# Altium PCB DA2_VERR2_PCB.PcbDoc (part 2 of 2)
Units mm, origin at the board's own origin, x right, y up, seen from the top; angles counter-clockwise.
Board outline 82.3 x 48.77 mm, 2 copper layers (Top Layer, Bottom Layer), stack 1.58 mm thick; 68 components, 71 nets, 299 pads, 149 vias.
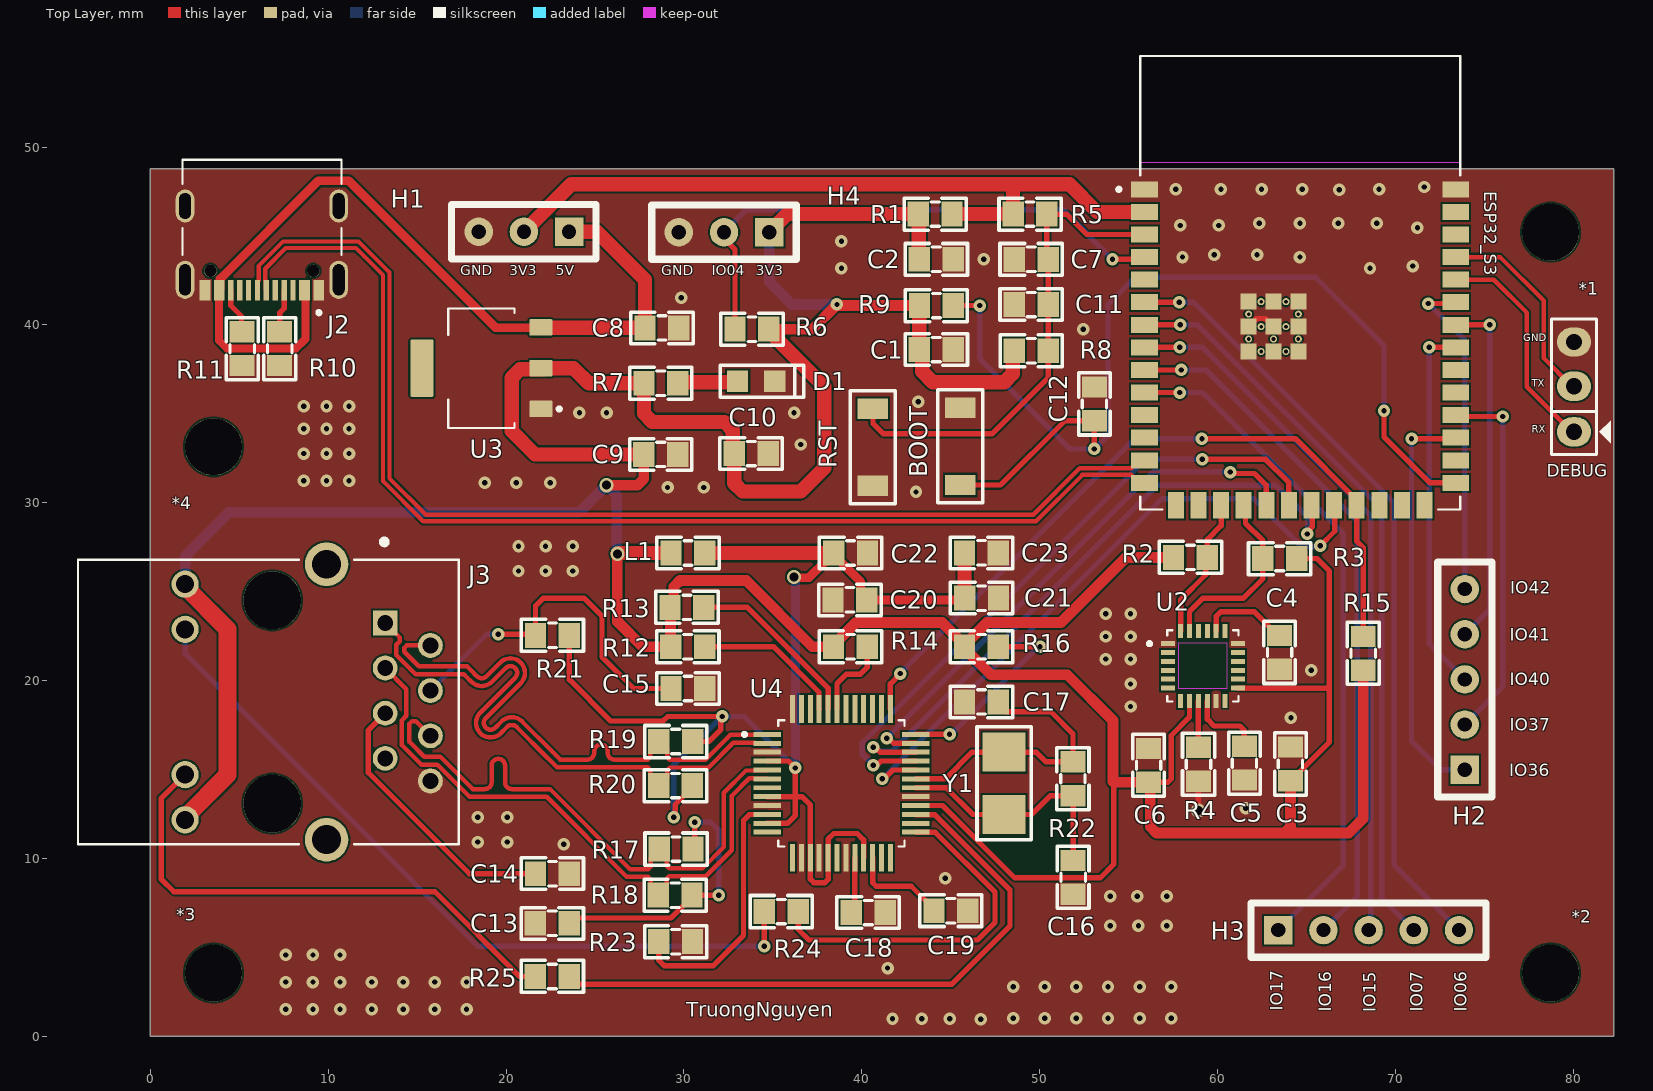
[diagram p0: Top Layer view]

## Via types
v1: diameter 0.7, hole 0.3, Top Layer to Bottom Layer, tented both sides, 145 vias
v2: diameter 0.8, hole 0.5, Top Layer to Bottom Layer, tented both sides, 4 vias

## Nets (pads, with @x,y where several pads share a name; then routed paths per layer and width w, separated by ;. In a path a pad name is that pad's centre, name@x,y a point inside that pad or via, vN(x,y) a via of type N, cw(c..) or ccw(c..) an arc to the next point about the centre after c; other vN are vias at no path point) (continued)
ETH_TX_N: J3.2 R19.1 U4.1 | length 34
  Top Layer w0.249: J3.2 14.417,21.976 14.271,21.83 14.271,21.624 15.096,20.799 17.809,20.799 18.123,20.485 18.302,20.306 18.366,20.242 ccw(c18.634,20.509) 18.901,20.242 19.672,21.012 ; 19.672,21.013 cw(c20.251,20.434) 20.829,21.013 cw(c20.251,20.434) 20.829,19.856 18.862,17.889 ccw(c19.129,17.621) 18.861,17.353 ccw(c19.129,17.621) 19.396,17.353 19.747,17.704 cw(c20.326,17.126) 20.831,17.768 20.84,17.768 20.903,17.705 ; 20.904,17.704 22.601,16.007 22.78,15.828 23.049,15.559 23.52,15.559 24.58,15.559 ccw(c24.58,15.938) 24.958,15.938 24.958,16.022 cw(c25.337,16.022) 25.715,16.022 25.715,15.938 ccw(c26.094,15.938) 26.094,15.559 26.975,15.559 27.973,15.559 28.119,15.705 28.119,16.101 R19.1 29.056,16.115 29.056,15.699 29.201,15.553 31.211,15.553 32.602,16.944 33.981,16.944 33.995,16.958 34.666,16.958 U4.1
ETH_TX_P: J3.1 R20.1 U4.2 | length 34
  Top Layer w0.249: J3.1 14.034,22.42 14.034,22.214 13.832,22.012 13.832,21.442 14.914,20.359 17.627,20.359 17.812,20.174 17.991,19.995 18.055,19.931 ccw(c18.634,20.509) 19.212,19.931 19.984,20.703 cw(c20.251,20.434) 20.518,20.702 cw(c20.251,20.434) 20.518,20.167 18.55,18.199 ccw(c19.129,17.621) 18.55,17.042 ccw(c19.129,17.621) 19.707,17.042 20.058,17.393 cw(c20.326,17.126) 20.594,17.393 22.29,15.696 22.469,15.517 22.867,15.12 27.973,15.12 28.119,14.974 28.119,14.558 R20.1 29.056,14.573 29.056,14.968 29.201,15.114 31.393,15.114 32.784,16.504 33.981,16.504 33.995,16.49 34.666,16.49 U4.2
GND: BOOT.2 C1.1 C2.1 C3.1 C4.2 C5.1 C6.1 C7.1 C8.1 C9.1 C10.2 C11.1 C12.1 C13.2 C14.2 C15.2 C16.2 C17.2 C18.2 C19.2 C20.2 C21.2 C22.2 C23.1 D1.1 DEBUG.3 ESP32_S3.1 ESP32_S3.40 ESP32_S3.41_1 ESP32_S3.41_2 ESP32_S3.41_3 ESP32_S3.41_4 ESP32_S3.41_5 ESP32_S3.41_6 ESP32_S3.41_7 ESP32_S3.41_8 ESP32_S3.41_9 H1.3 H4.3 J2.A1_B12 J2.A12_B1 J2.SH1 J2.SH2 J2.SH3 J2.SH4 J3.8 R4.1 R10.1 R11.1 R23.1 RST.2 U2.1 U2.11 U2.18 U3.1 U4.3 U4.9 U4.14 U4.16 U4.19 U4.29 U4.48 | length 3.4
  Top Layer w0.3: v2(58.928,12.7) 58.928,14.335 R4.1 ; ESP32_S3.41_2 62.206,40.355 62.706,40.355 ESP32_S3.41_1
  other v1: 46.685,0.965 41.732,0.991 43.383,0.991 44.958,0.991 48.514,1.016 50.292,1.016 52.07,1.016 53.848,1.016 55.626,1.016 57.404,1.016 7.62,1.524 9.144,1.524 10.668,1.524 12.446,1.524 14.224,1.524 16.002,1.524 17.78,1.524 48.514,2.794 50.292,2.794 52.07,2.794 53.848,2.794 55.626,2.794 57.404,2.794 7.62,3.048 9.144,3.048 10.668,3.048 12.446,3.048 14.224,3.048 16.002,3.048 17.78,3.048 41.453,3.835 7.62,4.572 9.144,4.572 10.668,4.572 53.975,6.223 55.562,6.221 57.15,6.223 53.975,7.874 55.499,7.874 57.15,7.874 44.704,8.89 23.241,10.795 18.415,10.922 20.066,10.922 18.415,12.319 20.066,12.319 61.595,12.827 64.135,17.907 55.118,18.542 55.118,19.812 65.278,20.574 53.721,21.209 55.118,21.209 53.721,22.479 55.118,22.479 53.721,23.749 55.118,23.749 20.701,26.162 22.225,26.162 23.749,26.162 20.701,27.559 22.225,27.559 23.749,27.559 43.053,30.607 29.083,30.861 31.115,30.861 18.796,31.115 20.574,31.115 22.479,31.115 8.636,31.242 9.906,31.242 11.176,31.242 8.636,32.766 9.906,32.766 11.176,32.766 36.576,33.274 8.636,34.163 9.906,34.163 11.176,34.163 24.13,35.052 25.654,35.052 36.195,35.052 8.636,35.433 9.906,35.433 11.176,35.433 43.18,35.687 52.451,39.751 29.845,41.529 38.862,43.18 68.58,43.18 70.993,43.307 46.863,43.688 58.039,43.815 64.643,43.815 59.817,43.942 62.23,43.942 38.862,44.704 71.247,45.466 57.912,45.593 60.071,45.593 62.357,45.72 64.643,45.72 66.802,45.72 68.961,45.72 66.847,47.591 57.658,47.625 60.198,47.625 62.484,47.625 64.77,47.625 69.088,47.625 71.628,47.752
GPIO0: BOOT.1 C12.2 ESP32_S3.27 R9.2 | length 60.1
  Top Layer w0.3: R9.2 v1(46.644,41.087) ; BOOT.1 47.808,30.997 51.417,34.606 C12.2 v1(53.083,33.023) ; v1(69.367,35.179) 69.367,33.706 71.958,31.115 ESP32_S3.27
  Bottom Layer w0.3: v1(46.644,41.087) 46.644,38.09 51.711,33.023 v1(53.083,33.023) 53.848,33.789 53.848,41.148 55.372,42.672 65.532,42.672 69.367,38.837 v1(69.367,35.179)
GPIO1: ESP32_S3.39
GPIO2: ESP32_S3.38
GPIO3: ESP32_S3.15
GPIO4: ESP32_S3.4 H4.2 R6.2 | length 31.1
  Top Layer w0.3: H4.2 32.258,44.86 32.878,44.24 R6.2 ; v1(54.102,43.688) 55.779,43.688 ESP32_S3.4
  Bottom Layer w0.3: H4.2 33.528,46.482 51.308,46.482 v1(54.102,43.688)
GPIO5: ESP32_S3.5
GPIO6: ESP32_S3.6 H3.5 | length 44.2
  Top Layer w0.3: ESP32_S3.6 v1(57.861,41.275)
  Bottom Layer w0.3: v1(57.861,41.275) 58.649,41.275 69.926,29.997 69.926,9.627 H3.5
GPIO7: ESP32_S3.7 H3.4 | length 42
  Top Layer w0.3: ESP32_S3.7 v1(57.912,40.005)
  Bottom Layer w0.3: v1(57.912,40.005) 58.877,40.005 69.24,29.642 69.24,7.772 H3.4
GPIO8: ESP32_S3.12
GPIO9: ESP32_S3.17 R2.1 U2.24 | length 8
  Top Layer w0.3: U2.24 57.932,24.538 59.344,25.95 59.344,26.832 R2.1 59.436,27.94 60.211,28.715 ESP32_S3.17
GPIO10: ESP32_S3.18 R3.1 U2.23 | length 10.7
  Top Layer w0.3: U2.23 58.432,23.888 59.182,24.638 61.468,24.638 62.554,25.724 R3.1 62.554,27.87 61.583,28.841 61.583,29.459 61.329,29.713 ESP32_S3.18
GPIO11: ESP32_S3.19 U4.35 | length 30.7
  Top Layer w0.3: v1(41.402,16.764) 41.51,16.764 41.8,16.474 U4.35 ; v1(60.731,31.725) 60.808,31.648 62.078,31.648 62.751,30.975 ESP32_S3.19
  Bottom Layer w0.3: v1(41.402,16.764) 56.375,31.737 60.719,31.737 v1(60.731,31.725)
GPIO12: ESP32_S3.20 U4.33 | length 36.4
  Top Layer w0.3: v1(40.64,15.24) 40.717,15.317 40.925,15.317 41.082,15.474 U4.33 ; v1(59.157,32.436) 62.713,32.436 64.021,31.127 ESP32_S3.20
  Bottom Layer w0.3: v1(40.64,15.24) 40.04,15.84 40.04,16.505 55.971,32.436 v1(59.157,32.436)
GPIO13: ESP32_S3.21 U4.34 | length 36.7
  Top Layer w0.3: v1(40.64,16.256) 40.748,16.256 41.03,15.974 U4.34 ; v1(65.049,28.245) 65.049,28.353 65.329,28.632 65.329,29.827 ESP32_S3.21
  Bottom Layer w0.3: v1(40.64,16.256) 40.748,16.256 40.987,16.017 41.671,16.017 56.642,30.988 63.271,30.988 65.065,29.195 65.065,28.26 v1(65.049,28.245)
GPIO14: ESP32_S3.22 U4.32 | length 37.1
  Top Layer w0.3: v1(41.148,14.478) 41.256,14.478 41.752,14.974 U4.32 ; v1(65.786,27.584) 66.599,28.397 66.599,29.827 ESP32_S3.22
  Bottom Layer w0.3: v1(41.148,14.478) 56.896,30.226 62.037,30.226 64.755,27.508 65.709,27.508 v1(65.786,27.584)
GPIO15: ESP32_S3.8 H3.3 | length 40
  Top Layer w0.3: ESP32_S3.8 v1(57.887,38.735)
  Bottom Layer w0.3: v1(57.887,38.735) 59.157,38.735 68.631,29.261 68.631,6.096 H3.3
GPIO16: ESP32_S3.9 H3.2 | length 39.3
  Top Layer w0.3: ESP32_S3.9 v1(57.963,37.465)
  Bottom Layer w0.3: v1(57.963,37.465) 59.36,37.465 67.869,28.956 67.869,7.874 H3.2
GPIO17: ESP32_S3.10 H3.1 | length 38.3
  Top Layer w0.3: ESP32_S3.10 v1(57.887,36.195)
  Bottom Layer w0.3: v1(57.887,36.195) 59.157,36.195 67.081,28.27 67.081,9.627 H3.1
GPIO18: ESP32_S3.11
GPIO21: ESP32_S3.23 R15.1 U4.37 | length 42.6
  Top Layer w0.3: U4.37 41.612,19.817 42.164,20.369 v1(42.164,20.396) ; v1(59.131,33.604) 64.392,33.604 67.831,30.165 ESP32_S3.23 67.831,27.851 68.199,27.483 R15.1
  Bottom Layer w0.3: v1(42.164,20.396) 55.372,33.604 v1(59.131,33.604)
GPIO35: ESP32_S3.28
GPIO36: ESP32_S3.29 H2.1 | length 23.2
  Top Layer w0.3: v1(70.917,33.604) 73.355,33.604 ESP32_S3.29
  Bottom Layer w0.3: v1(70.917,33.604) 70.917,16.612 72.542,14.986 H2.1
GPIO37: ESP32_S3.30 H2.2 | length 20.9
  Top Layer w0.3: ESP32_S3.30 73.482,34.849 v1(76.048,34.849)
  Bottom Layer w0.3: H2.2 76.048,19.66 v1(76.048,34.849)
GPIO38: ESP32_S3.31
GPIO39: ESP32_S3.32
GPIO40: ESP32_S3.33 H2.3 | length 21
  Top Layer w0.3: v1(71.907,38.735) ESP32_S3.33
  Bottom Layer w0.3: v1(71.907,38.735) 71.907,22.073 H2.3
GPIO41: ESP32_S3.34 H2.4 | length 19.9
  Top Layer w0.3: ESP32_S3.34 v1(75.311,40.005)
  Bottom Layer w0.3: H2.4 75.311,24.003 v1(75.311,40.005)
GPIO42: ESP32_S3.35 H2.5 | length 18.5
  Top Layer w0.3: v1(71.857,41.199) 73.33,41.199 ESP32_S3.35
  Bottom Layer w0.3: v1(71.857,41.199) 73.914,39.141 H2.5
GPIO45: ESP32_S3.26
GPIO46: ESP32_S3.16
GPIO47: ESP32_S3.24
GPIO48: ESP32_S3.25
INT: U2.12
INTN: R16.1 U4.36 | length 11.4
  Top Layer w0.3: U4.36 v1(44.939,16.974) ; R16.1 v1(50.028,21.905)
  Bottom Layer w0.3: v1(44.939,16.974) 45.018,16.974 49.949,21.905 v1(50.028,21.905)
LINKLED: R24.1 U4.25 | length 20.3
  Top Layer w0.3: R24.1 36.424,6.02 37.033,5.41 46.507,5.41 47.498,6.401 47.498,8.103 44.127,11.474 U4.25
NetC4_1: C4.1 U2.20 | length 5
  Top Layer w0.3: U2.20 59.932,23.61 60.198,23.876 62.056,23.876 63.397,22.536 C4.1
NetC5_2: C5.2 U2.10 | length 4.3
  Top Layer w0.3: U2.10 59.432,17.83 59.815,17.447 61.267,17.447 61.519,17.196 C5.2
NetC13_1: C13.1 R17.1 R18.1 | length 15.9
  Top Layer w0.3: C13.1 23.853,6.655 29.28,6.655 30.46,7.835 R18.1 v1(31.969,7.935) ; R17.1 30.607,10.621 v1(30.607,12.04)
  Bottom Layer w0.3: v1(30.607,12.04) 31.496,12.04 31.969,11.567 v1(31.969,7.935)
NetC14_1: C14.1 J3.5 | length 15.5
  Top Layer w0.3: J3.5 12.259,17.217 12.259,14.817 17.936,9.141 C14.1
NetC15_1: C15.1 J3.4 R21.1 | length 20.2
  Top Layer w0.3: v1(19.558,22.606) 21.6,22.606 R21.1 21.66,24.2 22.098,24.638 24.384,24.638 25.4,23.622 25.4,21.336 27.181,19.555 C15.1
  Bottom Layer w0.3: J3.4 18.918,22.606 v1(19.558,22.606)
NetC16_1: C16.1 R22.1 U4.30 Y1.1 | length 13.5
  Top Layer w0.3: U4.30 44.751,13.974 46.251,12.474 49.558,12.474 50.616,13.532 R22.1 51.889,13.52 C16.1
NetC17_1: C17.1 R22.2 U4.31 Y1.2 | length 16.3
  Top Layer w0.3: U4.31 44.7,14.474 46.2,15.974 49.812,15.974 50.354,15.432 R22.2@51.777,15.432 ; C17.1@47.752,18.729 C17.1 47.682,18.699 48.132,18.249 50.635,18.249 51.877,17.008 R22.2
NetC18_1: C18.1 U4.20 | length 3.2
  Top Layer w0.3: C18.1 39.612,7.153 U4.20
NetC19_1: C19.1 U4.22 | length 5.6
  Top Layer w0.3: U4.22 40.612,8.639 40.816,8.434 42.787,8.434 44.063,7.158 C19.1
NetD1_2: D1.2 R7.2 | length 3.5
  Top Layer w0.8: R7.2@29.673,36.702 R7.2 29.712,36.774 32.964,36.774 D1.2 ; D1.2@32.86,36.956 D1.2@32.876,36.94
NetJ2_A5: J2.A5 R10.2 | length 2.5
  Top Layer w0.3: R10.2 7.274,40.675 7.524,40.924 J2.A5
NetJ2_B5: J2.B5 R11.2 | length 2.6
  Top Layer w0.3: J2.B5 4.524,41.095 5.131,40.487 5.131,39.648 R11.2
NetJ3_10: J3.10 R24.2 | length 42.7
  Top Layer w0.3: v1(34.524,5.06) R24.2
  Bottom Layer w0.3: J3.10 1.958,21.512 18.41,5.06 v1(34.524,5.06)
NetJ3_11: J3.11 R25.2 | length 29.7
  Top Layer w0.3: J3.11 0.61,13.363 0.61,8.839 1.321,8.128 16.002,8.128 20.767,3.363 R25.2
NetR12_1: R12.1 U4.45 | length 8.4
  Top Layer w0.3: R12.1 35.042,21.905 37.602,19.345 37.602,18.414 U4.45
NetR13_1: R13.1 U4.44 | length 10
  Top Layer w0.3: R13.1 33.569,24.115 38.112,19.571 U4.44
NetR14_1: R14.1 U4.43 | length 4.7
  Top Layer w0.3: U4.43 38.612,19.835 39.137,20.361 39.921,20.361 40.316,20.755 R14.1
NetR23_2: R23.2 U4.10 | length 14.6
  Top Layer w0.3: R23.2 28.586,4.282 28.905,3.962 31.648,3.962 33.35,5.664 33.35,12.141 33.683,12.474 U4.10
U0RXD: DEBUG.1 ESP32_S3.36 | length 12.6
  Top Layer w0.249: ESP32_S3.36 75.54,42.545 77.394,40.691 77.394,36.519 79.927,33.985 DEBUG.1
U0TXD: DEBUG.2 ESP32_S3.37 | length 11.6
  Top Layer w0.249: ESP32_S3.37 75.895,43.815 78.359,41.351 78.359,38.119 79.927,36.551 DEBUG.2
VCC_3V3: C1.2 C2.2 C3.2 C6.2 C9.2 C10.1 H4.1 J3.9 J3.12 L1.1 R1.2 R2.2 R3.2 R6.1 R7.1 R8.1 R9.1 R12.2 R13.2 R14.2 R15.2 R16.2 U2.8 U2.13 U3.2 U4.28 | length 264.6
  Top Layer w0.3: U4.28 44.532,12.974 48.59,8.915 53.416,8.915 54.164,9.663 54.164,14.286 ; C6.2@56.231,14.286 57.212,14.286 57.404,14.478 57.404,16.916 58.432,17.944 U2.8 ; U2.13 66.263,19.578 66.294,19.609 ; C3.2 66.294,16.55 66.294,19.609 ; R3.2 65.593,26.863 66.294,26.162 66.294,19.609
  Top Layer w0.6: v2(25.654,30.988) 27.396,30.988 27.748,31.339 C9.2 ; v2(26.264,27.127) 26.264,23.317 27.676,21.905 R12.2 ; R12.2@29.246,22.03 29.246,24.089 R13.2 29.431,24.325 29.431,25.277 29.783,25.629 33.503,25.629 37.226,21.905 R14.2 38.416,22.005 39.677,23.266 44.52,23.266 R16.2@45.782,22.005 ; R6.1 37.221,39.761 v1(38.608,41.148) 38.635,41.148 38.696,41.087 R9.1 ; C6.2@56.231,14.286 C6.2@56.227,14.286 ; R2.2 54.864,26.924 51.206,23.266 47.043,23.266 R16.2@45.782,22.005 ; C3.2 64.106,11.781 63.755,11.43 ; R15.2 68.199,12.243 67.386,11.43 63.755,11.43 ; R16.2@45.782,22.005 R16.2 45.782,21.805 47.266,20.32 51.562,20.32 54.125,17.757 54.125,14.324 54.164,14.286 C6.2 C6.2@56.227,14.286 ; C6.2@56.227,14.286 56.227,11.781 56.578,11.43 63.755,11.43
  Top Layer w0.8: v2(26.264,27.127) 26.311,27.175 L1.1 ; C9.2 21.637,32.719 20.32,34.036 20.32,37.033 20.789,37.502 22.088,37.502 22.153,37.567 23.8,37.567 24.648,36.718 R7.1 27.756,35.013 28.225,34.544 32.283,34.544 32.752,34.075 32.752,32.847 C10.1 32.836,31.101 33.305,30.632 36.576,30.632 37.897,31.953 37.897,36.543 34.778,39.661 R6.1 ; H4.1 35.814,46.228 R1.2 ; R1.2@43.211,46.159 43.211,43.722 C2.2 ; R9.1@43.242,40.978 C1.2 43.4,38.453 43.4,37.372 43.993,36.779 48.018,36.779 48.487,37.248 48.487,38.45 R8.1
  Top Layer w1: J3.12 1.958,12.314 4.343,14.7 4.343,22.892 1.958,25.278 J3.9
  Bottom Layer w0.6: J3.9 1.958,27.002 4.42,29.464 24.13,29.464 v2(25.654,30.988) ; v2@25.656,30.986 26.225,30.417 26.225,27.165 v2(26.264,27.127) ; H4.1 34.798,42.418 36.068,41.148 v1(38.608,41.148)
VCC_5V: C8.2 H1.1 J2.A4_B9 J2.A9_B4 U3.3 | length 49.3
  Top Layer w0.45: J2.A9_B4 3.874,39.111 4.321,38.663 8.119,38.663 8.181,38.663 8.724,39.206 J2.A4_B9@8.724,41.91
  Top Layer w0.5: J2.A9_B4 3.924,42.01 3.924,42.58 9.451,48.108 11.151,48.108 19.416,39.842 21.978,39.842 U3.3 ; J2.A4_B9 J2.A4_B9@8.724,41.91 ; C8.2@27.803,39.842 C8.2
  Top Layer w0.8: U3.3@21.978,39.842 C8.2@27.803,39.842 ; H1.1 25.121,45.237 27.818,42.54 C8.2
VCC_PHYA(3V3): C20.1 C21.1 C22.1 C23.2 L1.2 R19.2 R20.2 R21.2 U4.4 U4.8 U4.11 U4.15 U4.17 U4.21 | length 81.2
  Top Layer w0.3: R21.2 23.56,20.051 25.883,17.729 28.838,17.729 29.093,17.984 v1(32.156,17.984) 32.079,17.908 32.079,17.246 31.41,16.576 R19.2 ; v1(29.439,12.319) 29.515,12.396 29.515,13.032 30.48,13.997 R20.2 ; U4.11 35.825,11.974 36.271,12.421 36.271,13.474 ; U4.8 36.271,13.474 ; U4.4 35.885,15.474 v1(36.271,15.088) 36.271,13.474 ; U4.21 40.112,11.044 39.751,11.405 38.43,11.405 38.112,11.086 38.112,8.812 37.936,8.636 37.313,8.636 37.112,8.837 37.112,13.002 36.64,13.474 36.271,13.474
  Top Layer w0.5: v2(36.195,25.832) 36.246,25.781 37.031,25.781 37.974,26.725 38.074,26.725 C22.1@38.424,27.075 ; C22.1 C22.1@38.424,27.075 ; C21.1 45.696,24.54 C20.1 39.944,24.886 39.944,25.555 C22.1@38.424,27.075
  Top Layer w0.8: L1.2 C22.1 ; C23.2@45.782,27.081 C23.2 45.786,27.177 45.786,24.639 C21.1
  Bottom Layer w0.3: v1(29.439,12.319) 29.439,15.267 v1(32.156,17.984) 33.375,17.984 v1(36.271,15.088)
  Bottom Layer w0.5: v2(36.195,25.832) 36.195,25.751 36.271,25.674 v1(36.271,15.088)
XCL: U2.7
XDA: U2.6
pads on no net: *1.1 *2.1 *3.1 *4.1 ESP32_S3.41_11 ESP32_S3.41_12 ESP32_S3.41_13 ESP32_S3.41_14 ESP32_S3.41_15 ESP32_S3.41_16 ESP32_S3.41_17 ESP32_S3.41_18 ESP32_S3.41_19 ESP32_S3.41_20 ESP32_S3.41_21 J2. J2.A8 J2.B6 J2.B7 J2.B8 J3. J3.7 J3.15 J3.16 U2.2 U2.3 U2.4 U2.5 U2.14 U2.15 U2.16 U2.17 U2.19 U2.21 U2.22 U3.4 U4.7 U4.12 U4.13 U4.18 U4.23 U4.24 U4.26 U4.38 U4.39 U4.40 U4.41 U4.42 U4.46 U4.47

## Polygon pours and split planes (outlines as drawn)
GND on Top Layer "GND" (solid, remove dead copper, pour order 0): 0,48.768 82.296,48.768 82.296,0 0,0
GND on Bottom Layer "GND" (solid, remove dead copper, pour order 1): 0,48.768 82.296,48.768 82.296,0 0,0

## Silkscreen, mask and mechanical layers (free items; w line width, h text height)
Top Overlay:
  text "GND" at 17.424,42.596 h1
  text "3V3" at 20.193,42.596 h1
  text "5V" at 22.784,42.596 h1
  text "GND" at 28.727,42.596 h1
  text "IO04" at 31.558,42.593 h1
  text "3V3" at 34.036,42.596 h1
  text "GND" at 77.191,38.938 h0.7
  text "TX" at 77.673,36.373 h0.7
  text "RX" at 77.673,33.782 h0.7
  text "IO42" at 76.476,24.889 h0.7
  text "IO41" at 76.451,22.247 h0.7
  text "IO40" at 76.425,19.733 h0.7
  text "IO37" at 76.425,17.193 h0.7
  text "IO36" at 76.4,14.627 h0.7
  text "IO17" at 63.681,1.445 h0.7 r90
  text "IO16" at 66.399,1.368 h0.7 r90
  text "IO07" at 71.555,1.368 h0.7 r90
  text "IO06" at 74.019,1.368 h0.7 r90
  text "IO15" at 68.913,1.343 h0.7 r90
  text "TruongNguyen" at 30.124,0.813 h1.4

## Dimensions
82.296,48.768 to 82.296,0 on Drill Drawing
0,48.768 to 82.296,48.768 on Drill Drawing

## Text inside footprints (layer, text, board x,y; h text height)
ESP32_S3: Mechanical 13 "ANTENNA" at 60.156,51.865 h1